# Altium PCB IoTMainBoard.PcbDoc (part 2 of 2)
Units mil, origin at the board's own origin, x right, y up, seen from the top; angles counter-clockwise.
Board outline 3945 x 3790 mil, 2 copper layers (Top Layer, Bottom Layer); 64 components, 75 nets, 263 pads, 93 vias.
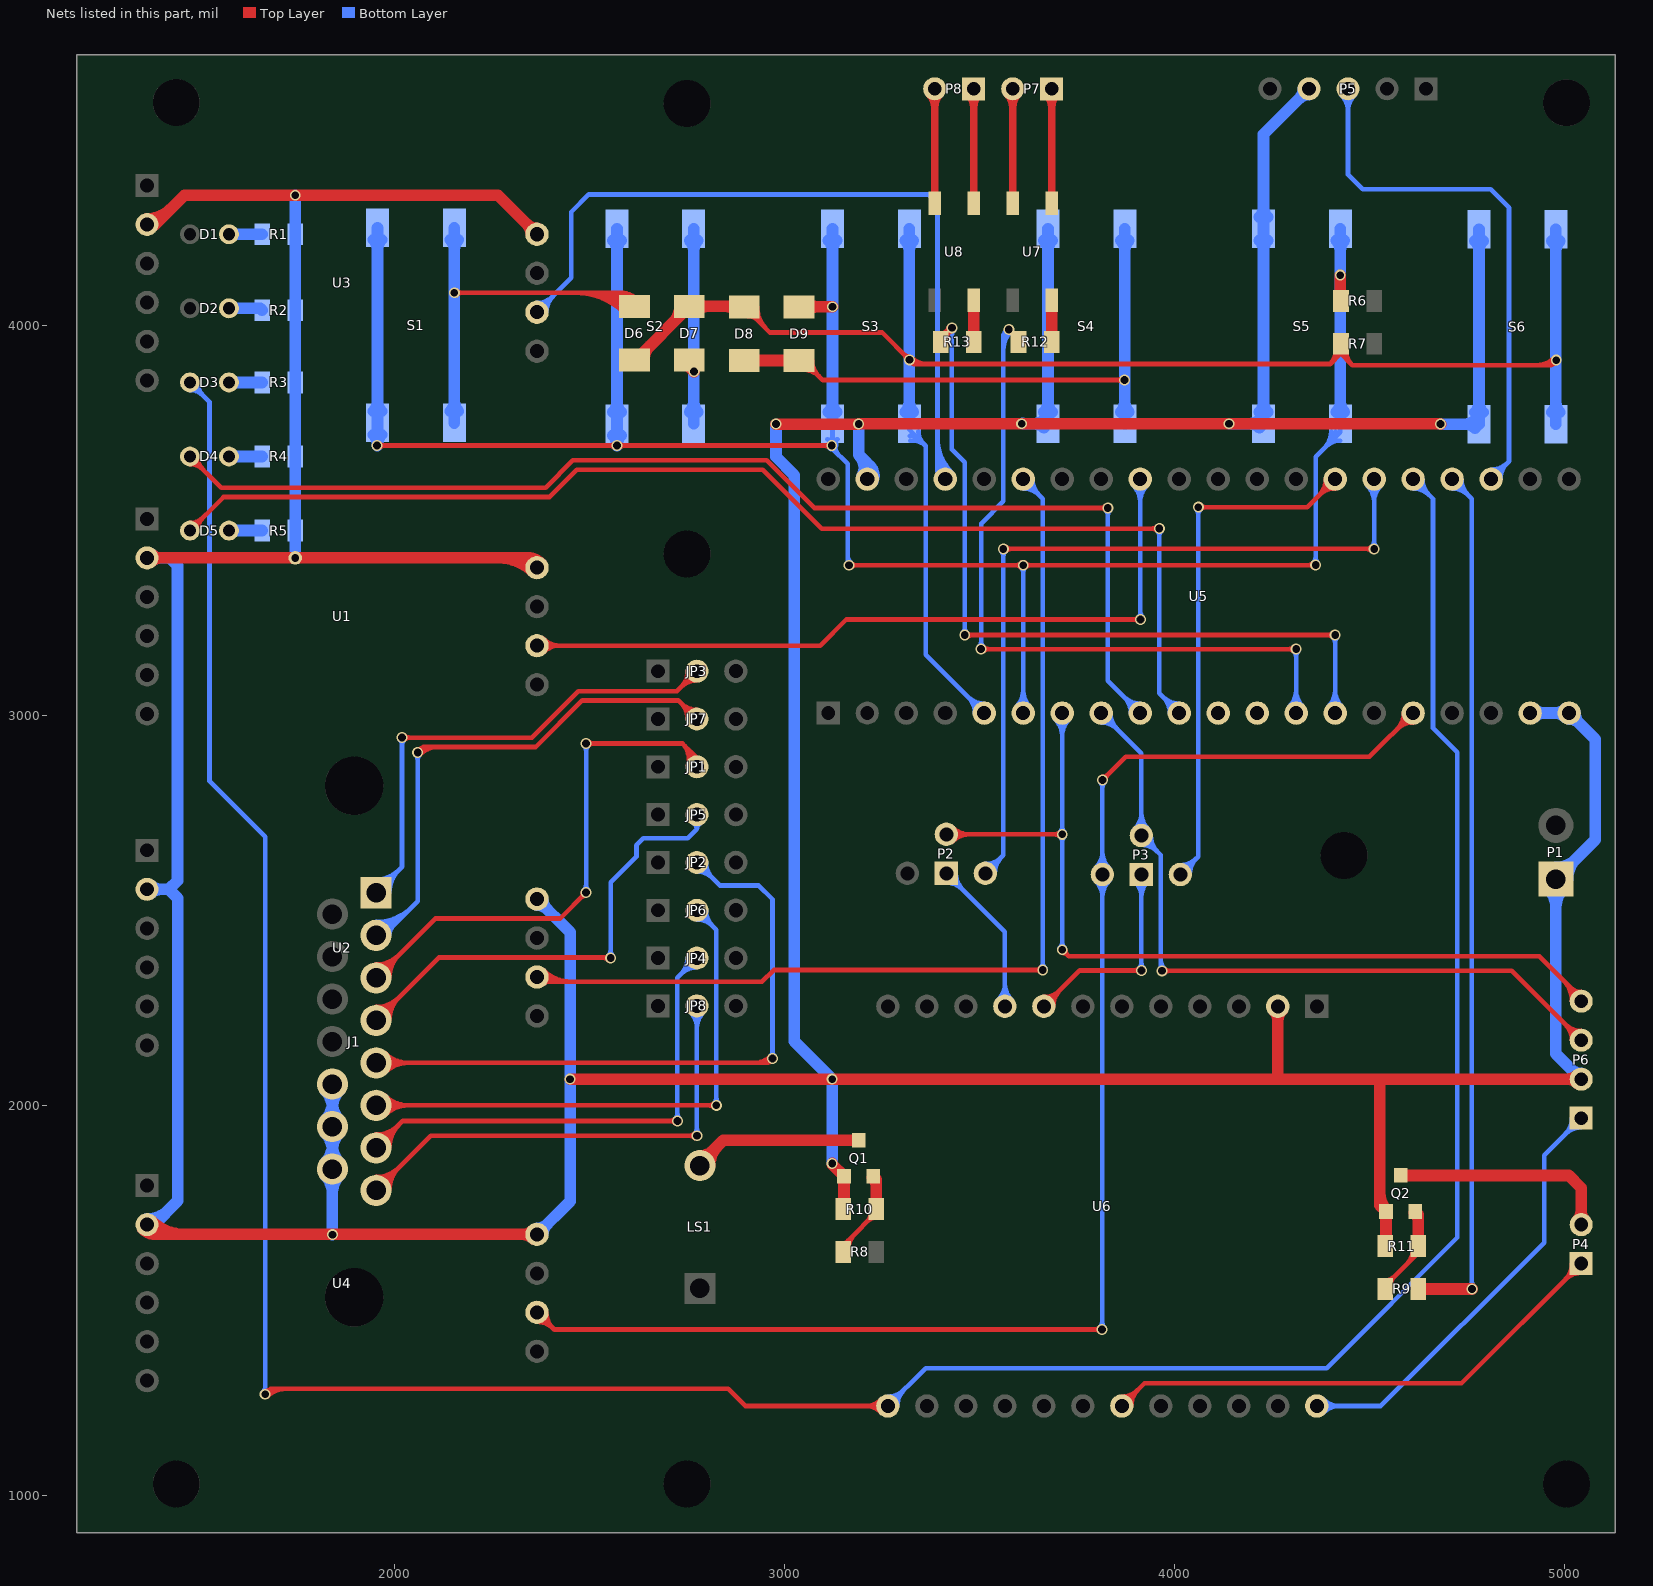
[diagram p2: the nets of this part, all layers, seen from the top]

## Via types
v1: diameter 28, hole 20, Top Layer to Bottom Layer, 93 vias

## Nets (pads, with @x,y where several pads share a name; then routed paths per layer and width w, separated by ;. In a path a pad name is that pad's centre, name@x,y a point inside that pad or via, vN(x,y) a via of type N, cw(c..) or ccw(c..) an arc to the next point about the centre after c; other vN are vias at no path point) (continued)
GND: J1.13 J1.14 J1.15 P1.1 P5.4 P6.2 pad.0 Q1.1 Q2.1 R1.1 R2.1 R3.1 R4.1 R5.1 R10.2 R11.2 S4.1 S5.1 S6.1 U1.2 U1.10 U2.2 U2.10 U3.2 U3.10 U4.2 U4.10 U5.19 U5.20 U5.39 U6.2 | length 20350.5
  Top Layer w30: U4.2@1354.06,1684.06 ccw(c1388,1718) 1388,1670 ; U4.2@1365,1680.47 cw(c1365,1645.4) 1389.8,1670.2 cw(c1414.6,1695) U4.2@1379.53,1695 ; U4.2@1365,1695 1390,1670 U4.10@2365,1670 ; U1.2@1365,3405 pad.0@1745,3405 2340,3405 ; U3.2@1365,4260 1386,4260 1461,4335 v1(1745,4335) 2265,4335 U3.10@2365,4235 ; U3.2@1365,4274.53 ccw(c1365,4360.3) 1425.65,4299.65 ; U4.2@1375.27,1705.27 ccw(c1460.43,1790.43) 1460.43,1670 ; U1.2@1375.27,3394.73 cw(c1400.07,3369.93) 1400.07,3405 cw(c1400.07,3440.07) U1.2@1375.27,3415.27 ; 2268.43,3405 cw(c2268.43,3283.43) U1.10@2354.39,3369.39 ; 2340.86,3405 cw(c2340.86,3355.86) U1.10@2375.61,3390.61 ; U3.10@2350,4235 ccw(c2313.79,4235) 2339.39,4260.61 ccw(c2365,4286.21) U3.10@2365,4250 ; U4.10@2354.39,1659.39 ccw(c2328.79,1633.79) 2328.79,1670 ccw(c2328.79,1706.21) U4.10@2354.39,1680.61 ; v1(2450,2068) v1(3122,2068) 4265,2068 ; v1(2978,3748) v1(3190,3748) ; v1(3122,1852) 3122,1849.34 Q1.1@3152.6,1818.74 3152.6,1737.36 R10.2@3150.24,1735 ; v1@3190,3749 v1(4140,3749) 4681,3749 v1(4682,3748) ; U5.39@3211,3607 U5.39@3212,3607 ; U6.2@4254.39,2244.39 cw(c4228.79,2218.79) 4265,2218.79 cw(c4301.21,2218.79) U6.2@4275.61,2244.39 ; U6.2@4265,2255 4265,2068 ; 4526.34,1775.54 ccw(c4588.41,1775.54) Q2.1@4544.52,1731.65 ; R11.2@4540.24,1640 4542.6,1642.36 Q2.1@4542.6,1728.74 4526.34,1745 4526.34,2066.66 4525,2068 ; P6.2@5032.73,2057.73 ccw(c5007.93,2032.93) 5007.93,2068 ccw(c5007.93,2103.07) P6.2@5032.73,2078.27 ; P6.2@5043,2068 4525,2068 ; 4265,2068 4525,2068
  Bottom Layer w30: U4.2@1365,1695 1383,1695 1444,1756 1444,2532 1421,2555 ; U4.2@1365,1709.53 ccw(c1365,1788.06) 1420.53,1732.53 ; U2.2@1365,2555 1421,2555 ; U1.2@1365,3405 1423,3405 1443,3385 1443,2577 1421,2555 ; U2.2@1375.27,2544.73 cw(c1400.07,2519.93) 1400.07,2555 cw(c1400.07,2590.07) U2.2@1375.27,2565.27 ; U1.2@1375.27,3394.73 cw(c1400.07,3369.93) 1400.07,3405 cw(c1400.07,3440.07) U1.2@1375.27,3415.27 ; pad.0@1745,3405 R5.1@1745,3475 R4.1@1745,3665 R3.1@1745,3855 R2.1@1745,4040 R1.1@1745,4235 v1(1745,4335) ; J1.15@1822.57,1819.82 cw(c1779.89,1777.14) 1840.25,1777.14 cw(c1900.61,1777.14) J1.15@1857.93,1819.82 ; J1.15@1822.57,1855.18 ccw(c1779.89,1897.86) 1840.25,1897.86 ccw(c1900.61,1897.86) J1.15@1857.93,1855.18 ; J1.14@1822.57,1928.82 cw(c1779.89,1886.14) 1840.25,1886.14 cw(c1900.61,1886.14) J1.14@1857.93,1928.82 ; J1.14@1822.57,1964.18 ccw(c1779.89,2006.86) 1840.25,2006.86 ccw(c1900.61,2006.86) J1.14@1857.93,1964.18 ; J1.13@1822.57,2037.82 cw(c1779.89,1995.14) 1840.25,1995.14 cw(c1900.61,1995.14) J1.13@1857.93,2037.82 ; v1@1840,1669 v1(1840.25,1669.25) J1.15@1840.25,1837.5 J1.14@1840.25,1946.5 J1.13@1840.25,2055.5 ; U4.10@2365,1670 2450,1755 v1(2450,2068) 2450,2445 U2.10@2365,2530 ; U4.10@2365,1685 ccw(c2365,1721.21) 2390.61,1695.61 ccw(c2416.21,1670) U4.10@2380,1670 ; U2.10@2365,2515 cw(c2365,2478.79) 2390.61,2504.39 cw(c2416.21,2530) U2.10@2380,2530 ; v1(2978,3748) 2978,3664 3025,3617 3025,2165 v1(3122,2068) v1(3122,1852) ; v1(3190,3748) 3190,3669.6 ; U5.39@3198.67,3613.88 ccw(c3156.21,3635.81) 3190,3669.6 ; U5.39@3201.39,3617.61 ccw(c3175.79,3643.21) 3212,3643.21 ccw(c3248.21,3643.21) U5.39@3222.61,3617.61 ; U5.39@3212,3607 3212,3647.6 3190,3669.6 ; 3219.03,3640.57 cw(c3194.5,3616.04) U5.39@3225.33,3600.12 ; v1@3611,3750 3612,3749 S4.1@3675.5,3749 S4.1@3675.5,4249 ; S4.1@3665.23,3738.73 ccw(c3640.43,3713.93) 3640.43,3749 ccw(c3640.43,3784.07) S4.1@3665.23,3759.27 ; S4.1@3665.23,3779.11 ccw(c3640.43,3803.91) 3675.5,3803.91 ccw(c3710.57,3803.91) S4.1@3685.77,3779.11 ; S4.1@3665.23,4218.89 cw(c3640.43,4194.09) 3675.5,4194.09 cw(c3710.57,4194.09) S4.1@3685.77,4218.89 ; v1(4140,3749) S5.1@4228.25,3749 S5.1@4228.25,4249 4228.25,4491.25 P5.4@4345,4608 ; S5.1@4217.98,3738.73 ccw(c4193.18,3713.93) 4193.18,3749 ccw(c4193.18,3784.07) S5.1@4217.98,3759.27 ; S5.1@4217.98,3779.11 ccw(c4193.18,3803.91) 4228.25,3803.91 ccw(c4263.32,3803.91) S5.1@4238.52,3779.11 ; S5.1@4217.98,4218.89 cw(c4193.18,4194.09) 4228.25,4194.09 cw(c4263.32,4194.09) S5.1@4238.52,4218.89 ; S5.1@4217.98,4279.11 ccw(c4193.18,4303.91) 4228.25,4303.91 ccw(c4263.32,4303.91) S5.1@4238.52,4279.11 ; P5.4@4330.47,4608 cw(c4295.4,4608) 4320.2,4583.2 cw(c4345,4558.4) P5.4@4345,4593.47 ; v1(4682,3748) S6.1@4781,3748 S6.1@4781,4248 ; S6.1@4770.73,3737.73 ccw(c4745.93,3712.93) 4745.93,3748 ccw(c4745.93,3783.07) S6.1@4770.73,3758.27 ; S6.1@4770.73,3778.11 ccw(c4745.93,3802.91) 4781,3802.91 ccw(c4816.07,3802.91) S6.1@4791.27,3778.11 ; S6.1@4770.73,4217.89 cw(c4745.93,4193.09) 4781,4193.09 cw(c4816.07,4193.09) S6.1@4791.27,4217.89 ; U5.19@4912,3007 U5.20@5012,3007 5079,2940 5079,2682 P1.1@4978,2581 4978,2133 P6.2@5043,2068 ; U5.19@4922.61,2996.39 cw(c4948.21,2970.79) 4948.21,3007 cw(c4948.21,3043.21) U5.19@4922.61,3017.61 ; P1.1@4956.79,2559.79 cw(c4905.57,2508.57) 4978,2508.57 cw(c5050.43,2508.57) P1.1@4999.21,2559.79 ; P1.1@4978,2611 ccw(c4978,2683.43) 5029.21,2632.21 ccw(c5080.43,2581) P1.1@5008,2581 ; U5.20@5001.39,2996.39 ccw(c4975.79,2970.79) 4975.79,3007 ccw(c4975.79,3043.21) U5.20@5001.39,3017.61 ; U5.20@5012,2992 cw(c5012,2955.79) 5037.61,2981.39 cw(c5063.21,3007) U5.20@5027,3007 ; P6.2@5028.47,2068 ccw(c4993.4,2068) 5018.2,2092.8 ccw(c5043,2117.6) P6.2@5043,2082.53
  other v1: 3608,3749
GPSOUT: P6.1 U6.24 | length 1295.1
  Bottom Layer w12: U6.24@4365,1230 4529,1230 4948,1649 4948,1873 P6.1@5043,1968 ; U6.24@4381.97,1213.03 cw(c4422.94,1172.06) 4422.94,1230 cw(c4422.94,1287.94) U6.24@4381.97,1246.97 ; P6.1@5019.47,1968 cw(c4962.67,1968) 5002.84,1927.84 cw(c5043,1887.67) P6.1@5043,1944.47
GPSRESET: P4.1 U6.19 | length 1509.4
  Top Layer w12: U6.19@3865,1230 3923,1288 4736,1288 P4.1@5043,1595 ; U6.19@3865,1254 ccw(c3865,1311.94) 3905.97,1270.97 ccw(c3946.94,1230) U6.19@3889,1230 ; P4.1@5019.47,1595 cw(c4962.67,1595) 5002.84,1554.84 cw(c5043,1514.67) P4.1@5043,1571.47
GPSRST: R9.2 U5.24 | length 2357.5
  Top Layer w30: R9.2@4625,1530 v1(4763,1530)
  Bottom Layer w12: U5.24@4712,3583 cw(c4712,3525.06) 4752.97,3566.03 cw(c4793.94,3607) U5.24@4736,3607 ; U5.24@4712,3607 4762,3557 4762,1531 v1(4763,1530) ; v1@4757.34,1535.66 ccw(c4746.1,1546.9) 4762,1546.9 ; 4762,1551.73 ccw(c4784.73,1551.73) v1@4768.66,1535.66
KEY1: D6.2 D7.1 D8.1 R7.1 S3.2 S6.2 U5.5 | length 5481.5
  Top Layer w12: D8.1@2896.33,4049 2962.33,3983 3250,3983 v1(3320,3913) 3331,3902 ; D8.1@2906.18,4025.47 cw(c2906.18,3992.43) 2929.54,4015.8 ; D8.1@2917.7,4049 ccw(c2969.29,4049) 2932.81,4012.52 ; D8.1@2929.7,4049 ccw(c3010.27,4049) 2953.3,3992.03 ; v1@3312,3913 ccw(c3292.69,3913) 3306.34,3926.66 ccw(c3320,3940.31) v1@3320,3921 ; v1@3317.17,3910.17 ccw(c3336.9,3929.9) 3336.9,3902 ; v1@3321.31,3905.11 cw(c3323.13,3894.13) 3331,3902 ; v1@3325.66,3918.66 ccw(c3365.87,3958.87) 3365.87,3902 ; v1@3327.89,3911.69 ccw(c3338.87,3909.87) 3331,3902 ; R7.1@4413.13,3944.08 cw(c4363.75,3937.25) 4399,3902 ; 4416.07,3919.07 ccw(c4393.74,3941.4) R7.1@4425.02,3945.73 ; R7.1@4427,3954 R7.1@4427,3930 ; R7.1@4428.98,3945.73 ccw(c4463.78,3940.9) 4438.94,3916.06 ; R7.1@4440.87,3944.08 ccw(c4493.75,3936.75) 4456,3899 ; 4928.3,3899 ccw(c4928.3,3962.7) v1@4973.34,3917.66 ; 4957.27,3899 ccw(c4957.27,3933.73) v1@4981.83,3909.17 ; v1@4971.01,3911.72 cw(c4953.89,3911.11) 4966,3899 ; v1@4978.72,3904.01 ccw(c4978.11,3886.89) 4966,3899 ; v1(4979,3912) 4966,3899 ; 3331,3902 4399,3902 ; 4399,3902 R7.1@4427,3930 ; R7.1@4427,3930 4427,3928 4456,3899 ; 4456,3899 4966,3899
  Top Layer w30: D6.2@2615,3912.2 2617.87,3912.2 D7.1@2755.67,4050 2895.33,4050 D8.1@2896.33,4049 ; D6.2@2639.37,3912.2 cw(c2691.27,3912.2) 2654.57,3948.91 ; 2714.06,4008.4 ccw(c2672.46,4050) D7.1@2731.3,4050 ; D7.1@2775.78,4039.73 cw(c2800.58,4014.93) 2800.58,4050 cw(c2800.58,4085.07) D7.1@2775.78,4060.27 ; 2849,4050 cw(c2849,4011.51) D8.1@2876.22,4038.73 ; 2853.83,4050 ccw(c2853.83,4081.66) D8.1@2876.22,4059.27
  Bottom Layer w12: S3.2@3319.75,3749 3319.75,3734.25 3362,3692 ; S3.2@3321.07,3717.71 cw(c3324.33,3689.45) S3.2@3344.44,3709.56 ; S3.2@3322.44,3705.78 cw(c3327.96,3657.96) 3362,3692 ; S3.2@3343.28,3729.16 ccw(c3387.78,3729.16) 3356.31,3697.69 ; U5.5@3488,3007 ccw(c3430.06,3007) 3471.03,3047.97 ccw(c3512,3088.94) U5.5@3512,3031 ; U5.5@3512,3007 3362,3157 3362,3692
  Bottom Layer w30: S3.2@3309.48,3779.11 ccw(c3284.68,3803.91) 3319.75,3803.91 ccw(c3354.82,3803.91) S3.2@3330.02,3779.11 ; S3.2@3309.48,4218.89 cw(c3284.68,4194.09) 3319.75,4194.09 cw(c3354.82,4194.09) S3.2@3330.02,4218.89 ; S3.2@3319.75,3749 S3.2@3319.75,4249 ; S6.2@4967.73,3778.11 ccw(c4942.93,3802.91) 4978,3802.91 ccw(c5013.07,3802.91) S6.2@4988.27,3778.11 ; S6.2@4967.73,4217.89 cw(c4942.93,4193.09) 4978,4193.09 cw(c5013.07,4193.09) S6.2@4988.27,4217.89 ; S6.2@4978,3748 S6.2@4978,4248
KEY2: D9.1 R6.1 S1.1 S2.1 S3.1 S5.2 U5.6 | length 7097.7
  Top Layer w12: v1(1955,3693) v1(2570,3693) v1(3121,3693) ; v1@1960.66,3687.34 cw(c1974.31,3673.69) 1974.31,3693 cw(c1974.31,3712.31) v1@1960.66,3698.66 ; v1@2564.34,3687.34 ccw(c2550.69,3673.69) 2550.69,3693 ccw(c2550.69,3712.31) v1@2564.34,3698.66 ; v1@2575.66,3687.34 cw(c2589.31,3673.69) 2589.31,3693 cw(c2589.31,3712.31) v1@2575.66,3698.66 ; v1@3115.34,3687.34 ccw(c3101.69,3673.69) 3101.69,3693 ccw(c3101.69,3712.31) v1@3115.34,3698.66 ; v1(3165,3386) v1(3612,3386) v1@4362,3386 ; v1@3170.66,3380.34 cw(c3184.31,3366.69) 3184.31,3386 cw(c3184.31,3405.31) v1@3170.66,3391.66 ; v1@3606.34,3380.34 ccw(c3592.69,3366.69) 3592.69,3386 ccw(c3592.69,3405.31) v1@3606.34,3391.66 ; v1@3617.66,3380.34 cw(c3631.31,3366.69) 3631.31,3386 cw(c3631.31,3405.31) v1@3617.66,3391.66 ; 4340.27,3386 ccw(c4340.27,3408.73) v1@4356.34,3392.66 ; 4345.1,3386 cw(c4345.1,3370.1) v1@4356.34,3381.34
  Top Layer w30: D9.1@3037,4049 v1(3123,4049) ; D9.1@3057.11,4038.73 cw(c3081.91,4013.93) 3081.91,4049 cw(c3081.91,4084.07) D9.1@3057.11,4059.27 ; v1(4425,4130) 4425,4066 R6.1@4427,4064
  Bottom Layer w12: S3.1@3109.7,3709.58 cw(c3093.42,3685.19) v1@3122.75,3685.19 ; v1@3115.34,3698.66 ccw(c3097.46,3716.54) S3.1@3122.75,3716.54 ; S3.1@3122.75,3708.09 ccw(c3136.09,3708.09) v1@3126.66,3698.66 ; S3.1@3122.75,3749 v1@3122.75,3694.75 ; v1@3129,3693 ccw(c3162.96,3693) 3138.95,3668.99 ; S3.1@3135.8,3709.58 ccw(c3152.08,3685.19) v1@3122.75,3685.19 ; 3162,3412.56 ccw(c3191.56,3412.56) v1@3170.66,3391.66 ; v1(3165,3386) 3162,3389 3162,3645.93 v1@3122.75,3685.18 ; U5.6@3595.03,3023.97 ccw(c3554.06,3064.94) 3612,3064.94 ccw(c3669.94,3064.94) U5.6@3628.97,3023.97 ; v1@3606.34,3380.34 cw(c3592.69,3366.69) 3612,3366.69 cw(c3631.31,3366.69) v1@3617.66,3380.34 ; U5.6@3612,3007 v1(3612,3386) ; v1@4356.34,3392.66 ccw(c4342.69,3406.31) 4362,3406.31 ccw(c4381.31,3406.31) v1@4367.66,3392.66 ; v1(4362,3387) 4362,3664 4425.25,3727.25 S5.2@4425.25,3749 ; 4383.74,3685.74 ccw(c4340.32,3729.16) S5.2@4401.72,3729.16 ; 4388.34,3690.34 cw(c4425.25,3653.43) S5.2@4425.25,3705.63 ; S5.2@4404.22,3706.22 ccw(c4381.29,3729.16) S5.2@4413.72,3729.16 ; v1@3122.75,3685.18 v1@3122.75,3694.75 ; v1@3122.75,3694.75 cw(c3136.14,3694.75) 3131.28,3707.23 ccw(c3136.14,3694.75) v1@3122.75,3694.75 ; v1@3122.75,3694.75 ccw(c3109.36,3694.75) 3114.22,3707.23 cw(c3109.36,3694.75) v1@3122.75,3694.75
  Bottom Layer w30: S1.1@1945.73,3720.89 cw(c1920.93,3696.09) 1956,3696.09 cw(c1991.07,3696.09) S1.1@1966.27,3720.89 ; S1.1@1945.73,3781.11 ccw(c1920.93,3805.91) 1956,3805.91 ccw(c1991.07,3805.91) S1.1@1966.27,3781.11 ; S1.1@1945.73,4220.89 cw(c1920.93,4196.09) 1956,4196.09 cw(c1991.07,4196.09) S1.1@1966.27,4220.89 ; v1(1955,3693) 1956,3694 S1.1@1956,3751 S1.1@1956,4251 ; S2.1@2559.73,3718.89 cw(c2534.93,3694.09) 2570,3694.09 cw(c2605.07,3694.09) S2.1@2580.27,3718.89 ; S2.1@2559.73,3779.11 ccw(c2534.93,3803.91) 2570,3803.91 ccw(c2605.07,3803.91) S2.1@2580.27,3779.11 ; S2.1@2559.73,4218.89 cw(c2534.93,4194.09) 2570,4194.09 cw(c2605.07,4194.09) S2.1@2580.27,4218.89 ; v1(2570,3693) S2.1@2570,3749 S2.1@2570,4249 ; S3.1@3112.48,3779.11 ccw(c3087.68,3803.91) 3122.75,3803.91 ccw(c3157.82,3803.91) S3.1@3133.02,3779.11 ; S3.1@3112.48,4218.89 cw(c3087.68,4194.09) 3122.75,4194.09 cw(c3157.82,4194.09) S3.1@3133.02,4218.89 ; v1(3121,3693) v1@3122.75,3694.75 ; S3.1@3122.75,3749 S3.1@3122.75,4249 ; S5.2@4414.98,3779.11 ccw(c4390.18,3803.91) 4425.25,3803.91 ccw(c4460.32,3803.91) S5.2@4435.52,3779.11 ; S5.2@4414.98,4218.89 cw(c4390.78,4194.69) 4425,4194.69 ; v1(4425,4130) 4425,4248.75 S5.2@4425.25,4249 ; 4425,4193.48 cw(c4460.93,4193.48) S5.2@4435.52,4218.89 ; S5.2@4425.25,3749 v1@4425.25,4130
LED1: D4.1 U5.9 | length 3253
  Top Layer w12: D4.1@1475,3645.41 cw(c1475,3598.11) 1508.44,3631.56 cw(c1541.89,3665) D4.1@1494.59,3665 ; D4.1@1475,3665 1555,3585 2387.06,3585 2457.06,3655 2954,3655 3076,3533 v1(3829,3533) ; v1@3823.34,3527.34 ccw(c3809.69,3513.69) 3809.69,3533 ccw(c3809.69,3552.31) v1@3823.34,3538.66
  Bottom Layer w12: v1@3823.34,3527.34 cw(c3809.69,3513.69) 3829,3513.69 cw(c3848.31,3513.69) v1@3834.66,3527.34 ; v1(3829,3533) 3829,3090 U5.9@3912,3007 ; U5.9@3888,3007 ccw(c3830.06,3007) 3871.03,3047.97 ccw(c3912,3088.94) U5.9@3912,3031
LED2: D5.1 U5.10 | length 3333.3
  Top Layer w12: D5.1@1475,3475 1561,3561 2397,3561 2467,3631 2944.06,3631 3095.06,3480 v1(3961,3480) ; D5.1@1475,3494.59 ccw(c1475,3541.89) 1508.44,3508.44 ccw(c1541.89,3475) D5.1@1494.59,3475 ; v1@3955.34,3474.34 ccw(c3941.69,3460.69) 3941.69,3480 ccw(c3941.69,3499.31) v1@3955.34,3485.66
  Bottom Layer w12: v1@3955.34,3474.34 cw(c3941.69,3460.69) 3961,3460.69 cw(c3980.31,3460.69) v1@3966.66,3474.34 ; v1(3961,3480) 3961,3058 U5.10@4012,3007 ; U5.10@3988,3007 ccw(c3930.06,3007) 3971.03,3047.97 ccw(c4012,3088.94) U5.10@4012,3031
NetD1_2: D1.2 R1.2 | length 85
  Bottom Layer w30: D1.2@1575,4235 R1.2@1660,4235
NetD2_2: D2.2 R2.2 | length 87.1
  Bottom Layer w30: D2.2@1575,4045 1655,4045 R2.2@1660,4040
NetD3_2: D3.2 R3.2 | length 85
  Bottom Layer w30: D3.2@1575,3855 R3.2@1660,3855
NetD4_2: D4.2 R4.2 | length 85
  Bottom Layer w30: D4.2@1575,3665 R4.2@1660,3665
NetD5_2: D5.2 R5.2 | length 85
  Bottom Layer w30: D5.2@1575,3475 R5.2@1660,3475
NetD6_1: D6.1 S1.2 | length 1634.4
  Top Layer w12: v1(2153,4085) 2580,4085 ; v1@2158.66,4079.34 cw(c2172.31,4065.69) 2172.31,4085 cw(c2172.31,4104.31) v1@2158.66,4090.66 ; 2463.86,4085 cw(c2463.86,3908.7) D6.1@2588.52,4033.36 ; 2492.83,4085 cw(c2492.83,3937.67) D6.1@2597.01,4041.85 ; 2521.8,4085 cw(c2521.8,3966.64) D6.1@2605.49,4050.33 ; 2550.77,4085 cw(c2550.77,3995.61) D6.1@2613.98,4058.82 ; 2579.74,4085 cw(c2579.74,4024.58) D6.1@2622.46,4067.3 ; 2581.8,4083.2 ccw(c2605.16,4106.57) D6.1@2605.16,4073.53 ; D6.1@2584.06,4060.41 ccw(c2564.88,4069.87) 2580,4085 ; D6.1@2615,4050 2580,4085
  Bottom Layer w30: S1.2@2142.73,3781.11 ccw(c2117.93,3805.91) 2153,3805.91 ccw(c2188.07,3805.91) S1.2@2163.27,3781.11 ; S1.2@2142.73,4220.89 cw(c2117.93,4196.09) 2153,4196.09 cw(c2188.07,4196.09) S1.2@2163.27,4220.89 ; S1.2@2153,3751 S1.2@2153,4251
NetD7_2: D7.2 S2.2 | length 675.7
  Top Layer w30: D7.2@2755.67,3910.36 ccw(c2795.36,3910.36) v1@2767.29,3882.29 ; D7.2@2755.67,3912.2 2755.67,3895.33 v1(2768,3883)
  Bottom Layer w30: S2.2@2756.73,3779.11 ccw(c2731.93,3803.91) 2767,3803.91 ccw(c2802.07,3803.91) S2.2@2777.27,3779.11 ; S2.2@2756.73,4218.89 cw(c2731.93,4194.09) 2767,4194.09 cw(c2802.07,4194.09) S2.2@2777.27,4218.89 ; S2.2@2767,3749 S2.2@2767,4249
NetD8_2: D8.2 D9.2 S4.2 | length 2003.7
  Top Layer w12: D9.2@3037,3911.21 3047.79,3911.21 3098,3861 v1(3872,3861) ; D9.2@3046.84,3887.68 cw(c3046.84,3828.58) 3088.63,3870.37 ; D9.2@3070.37,3911.21 ccw(c3124.87,3911.21) 3086.33,3872.67 ; v1@3866.34,3855.34 ccw(c3852.69,3841.69) 3852.69,3861 ccw(c3852.69,3880.31) v1@3866.34,3866.66
  Top Layer w30: D8.2@2896.33,3911.2 D9.2@3037,3911.21 ; D8.2@2916.45,3900.93 cw(c2941.25,3876.13) 2941.25,3911.2 cw(c2941.25,3946.28) D8.2@2916.45,3921.48 ; D9.2@3016.88,3900.93 ccw(c2992.09,3876.14) 2992.09,3911.2 ccw(c2992.08,3946.28) D9.2@3016.88,3921.48
  Bottom Layer w30: S4.2@3862.23,4218.89 cw(c3837.43,4194.09) 3872.5,4194.09 cw(c3907.57,4194.09) S4.2@3882.77,4218.89 ; 3872,3802.71 cw(c3838.63,3802.71) 3862.23,3779.11 ccw(c3837.43,3803.91) 3872.5,3803.91 ccw(c3907.57,3803.91) 3882.77,3779.11 cw(c3908.78,3805.12) 3872,3805.12 ; v1(3872,3861) 3872,3749.5 S4.2@3872.5,3749 S4.2@3872.5,4249
NetLS1_2: LS1.2 Q1.3 | length 531.6
  Top Layer w30: LS1.2@2783,1846.48 2783,1851.48 2842.78,1911.26 Q1.3@3190,1911.26 ; LS1.2@2783,1871.48 ccw(c2783,1919.76) 2817.14,1885.62 ; LS1.2@2808,1846.48 cw(c2880.43,1846.48) 2829.21,1897.69
NetP4_2: P4.2 Q2.3 | length 625.5
  Top Layer w30: Q2.3@4580,1821.26 5010.74,1821.26 5043,1789 P4.2@5043,1695 ; P4.2@5032.73,1705.27 ccw(c5007.93,1730.07) 5043,1730.07 ccw(c5078.07,1730.07) P4.2@5053.27,1705.27
NetQ1_2: Q1.2 R8.1 R10.1 | length 391.5
  Top Layer w12: R8.1@3150.24,1625 3164,1638.76 3164,1655 ; R8.1@3162.21,1640.25 cw(c3172.51,1646.48) 3164,1655 ; R8.1@3164.24,1633 cw(c3217.92,1633) 3179.96,1670.96 ; 3210.8,1701.8 ccw(c3185.59,1727) R10.1@3221.24,1727 ; 3212.64,1703.64 cw(c3235.24,1681.05) R10.1@3235.24,1713 ; R10.1@3235.24,1735 3235.24,1726.24 3164,1655 ; R8.1@3150.24,1647 ccw(c3150.24,1660.92) 3160.08,1651.08 cw(c3150.24,1660.92) R8.1@3150.24,1647
  Top Layer w30: Q1.2@3225.48,1815.83 cw(c3201.93,1792.28) 3235.24,1792.28 ; Q1.2@3227.4,1818.74 3235.24,1810.91 R10.1@3235.24,1735
NetQ2_2: Q2.2 R9.1 R11.1 | length 380.1
  Top Layer w12: R9.1@4540,1530 4540,1538 4625.24,1623.24 R11.1@4625.24,1640 ; R9.1@4540,1552 ccw(c4540,1585.8) 4563.9,1561.9 ccw(c4587.8,1538) R9.1@4554,1538 ; 4595.14,1593.14 ccw(c4556.28,1632) R11.1@4611.24,1632 ; R11.1@4615.62,1613.62 ccw(c4597.25,1632) R11.1@4623.24,1632
  Top Layer w30: Q2.2@4615.48,1725.83 cw(c4591.93,1702.28) 4625.24,1702.28 ; Q2.2@4617.4,1728.74 4625.24,1720.91 R11.1@4625.24,1640
NetR12_2: R12.2 U7.2 | length 107
  Top Layer w30: R12.2@3685,3959 U7.2@3685,4066
NetR13_2: R13.2 U8.2 | length 107
  Top Layer w30: R13.2@3485,3959 U8.2@3485,4066
OUT1: R12.1 U5.13 | length 2116.4
  Top Layer w12: v1(3504,3171) v1(4312,3171) ; v1@3509.66,3165.34 cw(c3523.31,3151.69) 3523.31,3171 cw(c3523.31,3190.31) v1@3509.66,3176.66 ; v1@4306.34,3165.34 ccw(c4292.69,3151.69) 4292.69,3171 ccw(c4292.69,3190.31) v1@4306.34,3176.66
  Bottom Layer w12: v1@3498.34,3176.66 ccw(c3484.69,3190.31) 3504,3190.31 ccw(c3523.31,3190.31) v1@3509.66,3176.66 ; v1(3504,3171) 3504,3493 3561,3550 3561,3977 v1(3575,3991) ; 3561,3937.89 cw(c3628.11,3937.89) v1@3580.66,3985.34 ; 3561,3966.86 cw(c3599.14,3966.86) v1@3572.17,3993.83 ; U5.13@4295.03,3023.97 ccw(c4254.06,3064.94) 4312,3064.94 ccw(c4369.94,3064.94) U5.13@4328.97,3023.97 ; v1@4306.34,3165.34 cw(c4292.69,3151.69) 4312,3151.69 cw(c4331.31,3151.69) v1@4317.66,3165.34 ; U5.13@4312,3007 v1(4312,3171)
OUT1A: P7.2 U7.4 | length 368.1
  Top Layer w20: P7.2@3571.19,4594.19 cw(c3537.86,4560.86) 3585,4560.86 cw(c3632.14,4560.86) P7.2@3598.81,4594.19 ; U7.4@3585,4314 P7.2@3585,4608
OUT1B: P7.1 U7.3 | length 368.1
  Top Layer w20: P7.1@3671.19,4594.19 cw(c3637.86,4560.86) 3685,4560.86 cw(c3732.14,4560.86) P7.1@3698.81,4594.19 ; U7.3@3685,4314 P7.1@3685,4608
OUT2: R13.1 U5.14 | length 2386.5
  Top Layer w12: R13.1@3400,3959 3400,3966 v1(3429,3995) ; R13.1@3400,3981 ccw(c3400,4017.21) v1@3425.61,3991.61 ; R13.1@3410.3,3982.77 ccw(c3398.52,4003.17) v1@3421.27,3997.07 ; R13.1@3414,3967 cw(c3445.38,3967) v1@3423.19,3989.19 ; R13.1@3414.94,3974.89 cw(c3437.95,3961.61) v1@3431.07,3987.27 ; R13.1@3415.49,3985.77 cw(c3423.03,3972.71) v1@3426.93,3987.27 ; 3420.07,3983.78 ccw(c3409.63,3989.81) v1@3421.27,3992.93 ; v1@3421,3995 cw(c3401.69,3995) 3415.34,3981.34 cw(c3429,3967.69) v1@3429,3987 ; v1(3462,3207) v1(4412,3207) ; v1@3467.66,3201.34 cw(c3481.31,3187.69) 3481.31,3207 cw(c3481.31,3226.31) v1@3467.66,3212.66 ; v1@4406.34,3201.34 ccw(c4392.69,3187.69) 4392.69,3207 ccw(c4392.69,3226.31) v1@4406.34,3212.66
  Bottom Layer w12: v1@3423.34,3989.34 cw(c3409.69,3975.69) 3429,3975.69 cw(c3448.31,3975.69) v1@3434.66,3989.34 ; v1(3429,3995) 3429,3683 3462,3650 v1(3462,3207) ; v1@3456.34,3212.66 ccw(c3442.69,3226.31) 3462,3226.31 ccw(c3481.31,3226.31) v1@3467.66,3212.66 ; U5.14@4395.03,3023.97 ccw(c4354.06,3064.94) 4412,3064.94 ccw(c4469.94,3064.94) U5.14@4428.97,3023.97 ; v1@4406.34,3201.34 cw(c4392.69,3187.69) 4412,3187.69 cw(c4431.31,3187.69) v1@4417.66,3201.34 ; U5.14@4412,3007 v1(4412,3207)
OUT2A: P8.2 U8.4 | length 368.1
  Top Layer w20: P8.2@3371.19,4594.19 cw(c3337.86,4560.86) 3385,4560.86 cw(c3432.14,4560.86) P8.2@3398.81,4594.19 ; U8.4@3385,4314 P8.2@3385,4608
OUT2B: P8.1 U8.3 | length 368.1
  Top Layer w20: P8.1@3471.19,4594.19 cw(c3437.86,4560.86) 3485,4560.86 cw(c3532.14,4560.86) P8.1@3498.81,4594.19 ; U8.3@3485,4314 P8.1@3485,4608
PWR: D3.1 U5.25 U6.13 | length 8417.4
  Top Layer w12: v1@1665.17,1262.83 cw(c1692.14,1235.86) 1692.14,1274 ; v1(1668,1260) 1682,1274 2855,1274 2899,1230 U6.13@3265,1230 ; v1@1668,1268 ccw(c1668,1287.31) 1681.66,1273.66 ccw(c1695.31,1260) v1@1676,1260 ; v1@1673.66,1254.34 cw(c1721.11,1206.89) 1721.11,1274 ; U6.13@3248.03,1213.03 ccw(c3207.06,1172.06) 3207.06,1230 ccw(c3207.06,1287.94) U6.13@3248.03,1246.97
  Bottom Layer w12: D3.1@1475,3835.41 cw(c1475,3788.11) 1508.44,3821.56 cw(c1541.89,3855) D3.1@1494.59,3855 ; D3.1@1475,3855 1525,3805 1525,2833 1668,2690 v1(1668,1260) ; v1@1662.34,1265.66 ccw(c1648.69,1279.31) 1668,1279.31 ccw(c1687.31,1279.31) v1@1673.66,1265.66 ; U6.13@3265,1230 3362,1327 4390,1327 4725,1662 4725,2906 4663,2968 4663,3556 U5.25@4612,3607 ; U6.13@3265,1254 ccw(c3265,1311.94) 3305.97,1270.97 ccw(c3346.94,1230) U6.13@3289,1230 ; U5.25@4612,3583 cw(c4612,3525.06) 4652.97,3566.03 cw(c4693.94,3607) U5.25@4636,3607
RELAY1: U5.11
RELAY2: U5.12
RXD: P2.4 U6.9 | length 585.2
  Bottom Layer w12: P2.4@3415,2572 cw(c3415,2514.06) 3455.97,2555.03 cw(c3496.94,2596) P2.4@3439,2596 ; P2.4@3415,2596 3565,2446 U6.9@3565,2255 ; U6.9@3548.03,2271.97 ccw(c3507.06,2312.94) 3565,2312.94 ccw(c3622.94,2312.94) U6.9@3581.97,2271.97
RXD1: P3.1 U5.27 | length 1584.6
  Top Layer w12: v1(4061,3535) 4340,3535 U5.27@4412,3607 ; v1@4066.66,3529.34 cw(c4080.31,3515.69) 4080.31,3535 cw(c4080.31,3554.31) v1@4066.66,3540.66 ; U5.27@4388,3607 cw(c4330.06,3607) 4371.03,3566.03 cw(c4412,3525.06) U5.27@4412,3583
  Bottom Layer w12: P3.1@4015,2593 4061,2639 v1(4061,3535) ; P3.1@4015,2617 ccw(c4015,2674.94) 4055.97,2633.97 ccw(c4096.94,2593) P3.1@4039,2593 ; v1@4055.34,3529.34 cw(c4041.69,3515.69) 4061,3515.69 cw(c4080.31,3515.69) v1@4066.66,3529.34
RXD2: P3.2 P6.3 U5.8 | length 2288.9
  Top Layer w12: v1(3968,2346) 4865,2346 P6.3@5043,2168 ; v1@3973.66,2340.34 cw(c3987.31,2326.69) 3987.31,2346 cw(c3987.31,2365.31) v1@3973.66,2351.66 ; P6.3@5019.47,2168 ccw(c4962.67,2168) 5002.84,2208.16 ccw(c5043,2248.33) P6.3@5043,2191.53
  Bottom Layer w12: U5.8@3812,2983 cw(c3812,2925.06) 3852.97,2966.03 cw(c3893.94,3007) U5.8@3836,3007 ; U5.8@3812,3007 3915,2904 P3.2@3915,2693 3965,2643 v1@3965,2346 ; P3.2@3898.03,2709.97 ccw(c3857.06,2750.94) 3915,2750.94 ccw(c3972.94,2750.94) P3.2@3931.97,2709.97 ; P3.2@3915,2669 cw(c3915,2611.06) 3955.97,2652.03 cw(c3996.94,2693) P3.2@3939,2693 ; 3965,2372.56 ccw(c3994.56,2372.56) v1@3973.66,2351.66
SCK1: U1.8 U5.32 | length 2178.5
  Top Layer w12: U1.8@2365,3180 3091,3180 3158,3247 v1(3913,3247) ; U1.8@2381.97,3163.03 cw(c2422.94,3122.06) 2422.94,3180 cw(c2422.94,3237.94) U1.8@2381.97,3196.97 ; v1@3907.34,3241.34 ccw(c3893.69,3227.69) 3893.69,3247 ccw(c3893.69,3266.31) v1@3907.34,3252.66
  Bottom Layer w12: U5.32@3895.03,3590.03 cw(c3854.06,3549.06) 3912,3549.06 cw(c3969.94,3549.06) U5.32@3928.97,3590.03 ; v1@3907.34,3252.66 ccw(c3896.1,3263.9) 3912,3263.9 ; v1@3912,3247 U5.32@3912,3607 ; 3912,3268.73 ccw(c3934.73,3268.73) v1@3918.66,3252.66
SCK2: U2.8 U5.35 | length 2923.9
  Top Layer w12: U2.8@2373.49,2338.49 ccw(c2422.94,2387.94) 2422.94,2318 ; U2.8@2381.97,2313.03 cw(c2393.97,2301.03) 2393.97,2318 cw(c2393.97,2358.97) U2.8@2365,2330 2377,2318 2942,2318 2972,2348 v1(3662,2348) ; U2.8@2381.97,2346.97 ccw(c2451.91,2416.91) 2451.91,2318 ; v1@3656.34,2342.34 ccw(c3642.69,2328.69) 3642.69,2348 ccw(c3642.69,2367.31) v1@3656.34,2353.66
  Bottom Layer w12: U5.35@3612,3583 cw(c3612,3525.06) 3652.97,3566.03 cw(c3693.94,3607) U5.35@3636,3607 ; U5.35@3612,3607 3662,3557 v1(3662,2348) ; v1@3656.34,2353.66 ccw(c3642.69,2367.31) 3662,2367.31 ccw(c3681.31,2367.31) v1@3667.66,2353.66
SCK3: U3.8 U5.37 | length 2295.5
  Bottom Layer w12: U3.8@2365,4035 2453,4123 2453,4292 2498,4337 3368,4337 3392,4313 3392,3627 U5.37@3412,3607 cw(c3460.28,3655.28) 3392,3655.28 ; U3.8@2365,4059 ccw(c2365,4116.94) 2405.97,4075.97 ccw(c2446.94,4035) U3.8@2389,4035 ; 3392,3684.25 ccw(c3489.25,3684.25) U5.37@3420.49,3615.49 ; 3392,3713.23 ccw(c3518.23,3713.23) U5.37@3428.97,3623.97
SCK4: P3.3 U4.8 U5.16 | length 4231.3
  Top Layer w12: U4.8@2365,1446 cw(c2365,1388.06) 2405.97,1429.03 cw(c2446.94,1470) U4.8@2389,1470 ; U4.8@2365,1470 2409,1426 v1(3814,1426) v1@3815,1426 ; v1@3808.34,1420.34 ccw(c3794.69,1406.69) 3794.69,1426 ccw(c3794.69,1445.31) v1@3808.34,1431.66 ; v1(3815,2835) 3875,2895 4500,2895 U5.16@4612,3007 ; v1@3815,2843 ccw(c3815,2862.31) 3828.66,2848.66 ccw(c3842.31,2835) v1@3823,2835 ; U5.16@4588,3007 cw(c4530.06,3007) 4571.03,2966.03 cw(c4612,2925.06) U5.16@4612,2983
  Bottom Layer w12: P3.3@3798.03,2576.03 cw(c3757.06,2535.06) 3815,2535.06 cw(c3872.94,2535.06) P3.3@3831.97,2576.03 ; P3.3@3798.03,2609.97 ccw(c3757.06,2650.94) 3815,2650.94 ccw(c3872.94,2650.94) P3.3@3831.97,2609.97 ; v1@3808.34,1431.66 ccw(c3792.27,1447.73) 3815,1447.73 ; v1@3809.34,2829.34 cw(c3795.69,2815.69) 3815,2815.69 cw(c3834.31,2815.69) v1@3820.66,2829.34 ; v1(3814,1426) 3815,1427 P3.3@3815,2593 v1(3815,2835) ; 3815,1442.9 ccw(c3830.9,1442.9) v1@3819.66,1431.66
SIG1+: J1.4 JP5.2 | length 1507.8
  Top Layer w12: J1.4@1952.25,2219 2113.25,2380 v1@2554,2380 ; J1.4@1952.25,2241 ccw(c1952.25,2294.11) 1989.81,2256.56 ccw(c2027.36,2219) J1.4@1974.25,2219 ; J1.4@1952.25,2253 ccw(c1952.25,2335.08) 2010.29,2277.04 ccw(c2068.33,2219) J1.4@1986.25,2219 ; 2532.27,2380 cw(c2532.27,2357.27) v1@2548.34,2373.34 ; 2537.1,2380 ccw(c2537.1,2395.9) v1@2548.34,2384.66
  Bottom Layer w12: v1@2548.34,2384.66 ccw(c2534.69,2398.31) 2554,2398.31 ccw(c2573.31,2398.31) v1@2559.66,2384.66 ; v1(2554,2379) 2554,2573 2620,2639 2620,2668 2638,2686 2752,2686 2775.12,2709.12 ; JP5.2@2764.93,2725.32 cw(c2757.14,2709.12) 2775.12,2709.12 ; JP5.2@2775.12,2746.53 2775.12,2709.12 ; JP5.2@2785.31,2725.32 ccw(c2793.1,2709.12) 2775.12,2709.12
SIG1-: J1.3 JP1.2 | length 1804.5
  Top Layer w12: J1.3@1952.25,2328 2104.25,2480 2424,2480 v1(2491,2547) ; J1.3@1952.25,2350 ccw(c1952.25,2403.11) 1989.81,2365.56 ccw(c2027.36,2328) J1.3@1974.25,2328 ; J1.3@1952.25,2362 ccw(c1952.25,2444.08) 2010.29,2386.04 ccw(c2068.33,2328) J1.3@1986.25,2328 ; v1@2483,2547 cw(c2463.69,2547) 2477.34,2533.34 cw(c2491,2519.69) v1@2491,2539 ; v1(2491,2929) 2738,2929 ; v1@2496.66,2923.34 cw(c2510.31,2909.69) 2510.31,2929 cw(c2510.31,2948.31) v1@2496.66,2934.66 ; JP1.2@2752.39,2875.26 ccw(c2698.67,2889.67) 2738,2929 ; 2752.69,2914.31 cw(c2721.84,2883.45) JP1.2@2763.98,2872.15 ; 2767.39,2899.61 cw(c2745.01,2877.24) JP1.2@2775.57,2869.04 ; JP1.2@2775.12,2869.16 2775.12,2891.88 2738,2929
  Bottom Layer w12: v1@2485.34,2552.66 ccw(c2471.69,2566.31) 2491,2566.31 ccw(c2510.31,2566.31) v1@2496.66,2552.66 ; v1@2485.34,2923.34 cw(c2471.69,2909.69) 2491,2909.69 cw(c2510.31,2909.69) v1@2496.66,2923.34 ; v1(2491,2547) v1(2491,2929)
SIG2+: J1.6 JP6.2 | length 1753.9
  Top Layer w12: J1.6@1952.25,2001 v1(2825,2001) ; J1.6@1967.81,1985.44 cw(c2005.36,1947.89) 2005.36,2001 cw(c2005.36,2054.11) J1.6@1967.81,2016.56 ; J1.6@1976.29,1976.96 cw(c2034.33,1918.92) 2034.33,2001 cw(c2034.33,2083.08) J1.6@1976.29,2025.04 ; v1@2819.34,1995.34 ccw(c2805.69,1981.69) 2805.69,2001 ccw(c2805.69,2020.31) v1@2819.34,2006.66
  Bottom Layer w12: JP6.2@2775.12,2477.74 cw(c2775.12,2420.94) 2815.28,2461.1 cw(c2855.45,2501.26) JP6.2@2798.65,2501.26 ; JP6.2@2775.12,2501.26 2825,2451.38 v1@2825,2003 ; v1@2819.34,2006.66 ccw(c2805.69,2020.31) 2825,2020.31 ccw(c2844.31,2020.31) v1@2830.66,2006.66
SIG2-: J1.5 JP2.2 | length 2082.1
  Top Layer w12: J1.5@1952.25,2110 2958,2110 ; J1.5@1967.81,2094.44 cw(c2005.36,2056.89) 2005.36,2110 cw(c2005.36,2163.11) J1.5@1967.81,2125.56 ; J1.5@1976.29,2085.96 cw(c2034.33,2027.92) 2034.33,2110 cw(c2034.33,2192.08) J1.5@1976.29,2134.04 ; 2923.13,2110 ccw(c2923.13,2166.87) v1@2963.34,2126.66 ; 2952.1,2110 ccw(c2952.1,2137.9) v1@2971.83,2118.17 ; v1@2961.11,2119.69 cw(c2950.13,2117.87) 2958,2110 ; v1@2967.69,2113.11 ccw(c2965.87,2102.13) 2958,2110 ; v1(2969,2121) 2958,2110
  Bottom Layer w12: JP2.2@2775.12,2600.37 cw(c2775.12,2543.57) 2815.28,2583.73 cw(c2855.45,2623.9) JP2.2@2798.65,2623.9 ; JP2.2@2775.12,2623.9 2834.02,2565 2933,2565 2969,2529 v1(2969,2121) ; v1@2963.34,2126.66 ccw(c2949.69,2140.31) 2969,2140.31 ccw(c2988.31,2140.31) v1@2974.66,2126.66
SIG3+: J1.2 JP7.2 | length 1812.9
  Top Layer w12: v1@2056.17,2908.83 cw(c2083.14,2881.86) 2083.14,2920 ; v1(2059,2906) 2073,2920 2361.94,2920 2481.26,3039.32 2727.59,3039.32 JP7.2@2775.12,2991.8 ; v1@2059,2914 ccw(c2059,2933.31) 2072.66,2919.66 ccw(c2086.31,2906) v1@2067,2906 ; v1@2064.66,2900.34 cw(c2112.11,2852.89) 2112.11,2920 ; JP7.2@2751.59,2991.8 ccw(c2694.79,2991.8) 2734.95,3031.96 ccw(c2775.12,3072.12) JP7.2@2775.12,3015.32
  Bottom Layer w12: J1.2@1952.25,2437 1972,2437 2059,2524 v1(2059,2906) ; J1.2@1952.25,2447 ccw(c1952.25,2518.82) 2003.04,2468.04 ; J1.2@1952.25,2459 ccw(c1952.25,2559.79) 2023.52,2488.52 ; J1.2@1952.25,2471 ccw(c1952.25,2600.76) 2044.01,2509.01 ; J1.2@1986.25,2437 cw(c2020.65,2437) 1996.33,2461.33 ; v1@2053.34,2900.34 cw(c2039.69,2886.69) 2059,2886.69 cw(c2078.31,2886.69) v1@2064.66,2900.34
SIG3-: J1.1 JP3.2 | length 1614.6
  Top Layer w12: v1(2019,2944) 2352,2944 2471.32,3063.32 2724.01,3063.32 JP3.2@2775.12,3114.43 ; v1@2024.66,2938.34 cw(c2038.31,2924.69) 2038.31,2944 cw(c2038.31,2963.31) v1@2024.66,2949.66 ; JP3.2@2751.59,3114.43 cw(c2694.79,3114.43) 2734.95,3074.26 cw(c2775.12,3034.1) JP3.2@2775.12,3090.9
  Bottom Layer w12: J1.1@1952.25,2546 2019,2612.75 v1(2019,2944) ; J1.1@1952.25,2568 ccw(c1952.25,2621.11) 1989.81,2583.56 ccw(c2027.36,2546) J1.1@1974.25,2546 ; J1.1@1952.25,2580 ccw(c1952.25,2662.08) 2010.29,2604.04 ccw(c2068.33,2546) J1.1@1986.25,2546 ; v1@2013.34,2938.34 cw(c1999.69,2924.69) 2019,2924.69 cw(c2038.31,2924.69) v1@2024.66,2938.34
SIG4+: J1.8 JP8.2 | length 1576
  Top Layer w12: J1.8@1952.25,1783 2092.25,1923 v1(2775,1923) ; J1.8@1952.25,1805 ccw(c1952.25,1858.11) 1989.81,1820.56 ccw(c2027.36,1783) J1.8@1974.25,1783 ; J1.8@1952.25,1817 ccw(c1952.25,1899.08) 2010.29,1841.04 ccw(c2068.33,1783) J1.8@1986.25,1783 ; v1@2769.34,1917.34 ccw(c2755.69,1903.69) 2755.69,1923 ccw(c2755.69,1942.31) v1@2769.34,1928.66
  Bottom Layer w12: JP8.2@2758.48,2239.37 cw(c2718.3,2199.22) 2775.1,2199.2 cw(c2831.9,2199.18) JP8.2@2791.75,2239.36 ; v1@2769.35,1928.66 ccw(c2755.69,1942.32) 2775.01,1942.31 ccw(c2794.32,1942.31) v1@2780.66,1928.65 ; v1(2775,1923) JP8.2@2775.12,2256
SIG4-: J1.7 JP4.2 | length 1602
  Top Layer w12: J1.7@1952.25,1892 2021.25,1961 v1(2725,1961) ; J1.7@1952.25,1914 ccw(c1952.25,1967.11) 1989.81,1929.56 ccw(c2027.36,1892) J1.7@1974.25,1892 ; J1.7@1952.25,1926 ccw(c1952.25,2008.08) 2010.29,1950.04 ccw(c2068.33,1892) J1.7@1986.25,1892 ; v1@2719.34,1955.34 ccw(c2705.69,1941.69) 2705.69,1961 ccw(c2705.69,1980.31) v1@2719.34,1966.66
  Bottom Layer w12: v1@2719.34,1966.66 ccw(c2705.69,1980.31) 2725,1980.31 ccw(c2744.31,1980.31) v1@2730.66,1966.66 ; v1(2725,1961) 2725,2328.51 JP4.2@2775.12,2378.63 ; JP4.2@2751.59,2378.63 cw(c2694.79,2378.63) 2734.95,2338.47 cw(c2775.12,2298.3) JP4.2@2775.12,2355.11
STB: P5.3 U5.23 | length 1563.5
  Bottom Layer w12: P5.3@4428.36,4591.36 cw(c4388.2,4551.2) 4445,4551.2 cw(c4501.8,4551.2) P5.3@4461.64,4591.36 ; P5.3@4445,4608 4445,4388 4483,4350 4811,4350 4858,4303 4858,3653 U5.23@4812,3607 ; U5.23@4812,3631 ccw(c4812,3688.94) 4852.97,3647.97 ccw(c4893.94,3607) U5.23@4836,3607
TXD: P3.4 U6.8 | length 776.8
  Top Layer w12: U6.8@3665,2255 3757,2347 v1(3915,2347) ; U6.8@3665,2279 ccw(c3665,2336.94) 3705.97,2295.97 ccw(c3746.94,2255) U6.8@3689,2255 ; v1@3909.34,2341.34 ccw(c3895.69,2327.69) 3895.69,2347 ccw(c3895.69,2366.31) v1@3909.34,2352.66
  Bottom Layer w12: P3.4@3898.03,2576.03 cw(c3857.06,2535.06) 3915,2535.06 cw(c3972.94,2535.06) P3.4@3931.97,2576.03 ; v1@3909.34,2352.66 ccw(c3895.69,2366.31) 3915,2366.31 ccw(c3934.31,2366.31) v1@3920.66,2352.66 ; v1(3915,2347) P3.4@3915,2593
TXD1: P2.1 U5.26 | length 2284.4
  Top Layer w12: v1(3561,3428) v1(4512,3428) ; v1@3566.66,3422.34 cw(c3580.31,3408.69) 3580.31,3428 cw(c3580.31,3447.31) v1@3566.66,3433.66 ; v1@4506.34,3422.34 ccw(c4492.69,3408.69) 4492.69,3428 ccw(c4492.69,3447.31) v1@4506.34,3433.66
  Bottom Layer w12: P2.1@3515,2596 3561,2642 v1(3561,3428) ; P2.1@3515,2620 ccw(c3515,2677.94) 3555.97,2636.97 ccw(c3596.94,2596) P2.1@3539,2596 ; v1@3555.34,3422.34 cw(c3541.69,3408.69) 3561,3408.69 cw(c3580.31,3408.69) v1@3566.66,3422.34 ; U5.26@4495.03,3590.03 cw(c4454.06,3549.06) 4512,3549.06 cw(c4569.94,3549.06) U5.26@4528.97,3590.03 ; v1@4506.34,3433.66 ccw(c4492.69,3447.31) 4512,3447.31 ccw(c4531.31,3447.31) v1@4517.66,3433.66 ; v1(4512,3428) U5.26@4512,3607
TXD2: P2.2 P6.4 U5.7 | length 2754.2
  Top Layer w12: P2.2@3415,2696 v1(3712,2696) ; P2.2@3431.97,2679.03 cw(c3472.94,2638.06) 3472.94,2696 cw(c3472.94,2753.94) P2.2@3431.97,2712.97 ; v1@3706.34,2690.34 ccw(c3692.69,2676.69) 3692.69,2696 ccw(c3692.69,2715.31) v1@3706.34,2701.66 ; v1@3712,2392 cw(c3712,2372.69) 3725.66,2386.34 cw(c3739.31,2400) v1@3720,2400 ; v1(3712,2400) 3729,2383 4935.94,2383 5043,2275.94 P6.4@5043,2268 ; 4997.22,2321.72 cw(c4943.5,2268) P6.4@5019.47,2268 ; 5016.39,2302.55 ccw(c5043,2329.16) P6.4@5043,2291.53 ; 5017.71,2301.24 cw(c4984.47,2268) P6.4@5031.47,2268
  Bottom Layer w12: U5.7@3695.03,2990.03 cw(c3654.06,2949.06) 3712,2949.06 cw(c3769.94,2949.06) U5.7@3728.97,2990.03 ; v1@3706.34,2405.66 ccw(c3692.69,2419.31) 3712,2419.31 ccw(c3731.31,2419.31) v1@3717.66,2405.66 ; v1@3706.34,2690.34 cw(c3692.69,2676.69) 3712,2676.69 cw(c3731.31,2676.69) v1@3717.66,2690.34 ; v1@3706.34,2701.66 ccw(c3692.69,2715.31) 3712,2715.31 ccw(c3731.31,2715.31) v1@3717.66,2701.66 ; v1(3712,2400) v1(3712,2696) U5.7@3712,3007
pads on no net: 1. 2. 3. 4. 5. 6. 7. 8. J1. U5.1 U5.2 U5.3 U5.4 U5.17 U5.28 U5.29 U5.33 U6.3 U6.4 U6.5 U6.6 U6.7 U6.10 U6.11 U6.12 U6.14 U6.15 U6.16 U6.17 U6.18 U6.20 U6.21 U6.22 U6.23

## Keep-outs
Keep-Out Layer:
  lines w10: 1190,910 5125,910 5125,4690 1190,4690 1190,910

## Silkscreen, mask and mechanical layers (free items; w line width, h text height)
Top Overlay:
  text "1A" at 3622,4440 h60 r90
  text "1B" at 3722,4440 h60 r90
  text "5V" at 4276,4432 h60 r90
  text "2A" at 3417,4430 h60 r90
  text "2B" at 3522,4430 h60 r90
  text "DIO" at 4676,4383.02 h60 r90
  text "GND" at 4375,4375 h60 r90
  text "STB" at 4476,4373.02 h60 r90
  text "CLK" at 4576,4373.02 h60 r90
  text "3-" at 2479,3088.5 h60
  text "5-" at 2960,3086.5 h60
  text "3+" at 2479,2965.87 h60
  text "5+" at 2960,2963.87 h60
  text "1-" at 2479,2843.24 h60
  text "1-" at 2960,2841.24 h60
  text "2" at 3395,2765 h60
  text "2" at 3894,2760 h60
  text "1+" at 2479,2720.6 h60
  text "1+" at 2960,2718.6 h60
  text "5V" at 4713,2682 h60
  text "2-" at 2479,2597.97 h60
  text "3-" at 2960,2595.97 h60
  text "3" at 3205,2566 h60
  text "1" at 3595,2566 h60
  text "1" at 4091,2564 h60
  text "3" at 3706,2563 h60
  text "GND" at 4658,2557 h60
  text "2+" at 2479,2475.34 h60
  text "3+" at 2960,2473.34 h60
  text "RX" at 3367,2468 h60
  text "TX" at 3904,2448 h60
  text "4-" at 2479,2352.71 h60
  text "7-" at 2960,2350.71 h60
  text "TX2" at 4813,2238 h60
  text "4+" at 2479,2230.07 h60
  text "7+" at 2960,2228.07 h60
  text "RX2" at 4813,2133 h60
  text "GND" at 4813,2038 h60
  text "GPSTX" at 4692,1938 h60
  text "G_RST" at 4960,1510 h60 r90
  text "IoT_MainBoard_171011" at 3305,979 h60
Bottom Overlay:
  text "5V" at 4810,2680 h60
  text "GND" at 4820,2555 h60

## Text inside footprints (layer, text, board x,y; h text height)
J1: Bottom Overlay "DB15F_DB" at 2049,1430 h60 r270
U6: Top Overlay "A7_BOARD" at 3720,1735 h60